# Altium PCB PCB1.PcbDoc
Units mm, origin at the board's own origin, x right, y up, seen from the top; angles counter-clockwise.
Board outline 152.4 x 101.6 mm, 2 copper layers (Top Layer, Bottom Layer); 15 components, 9 nets, 40 pads, 0 vias.
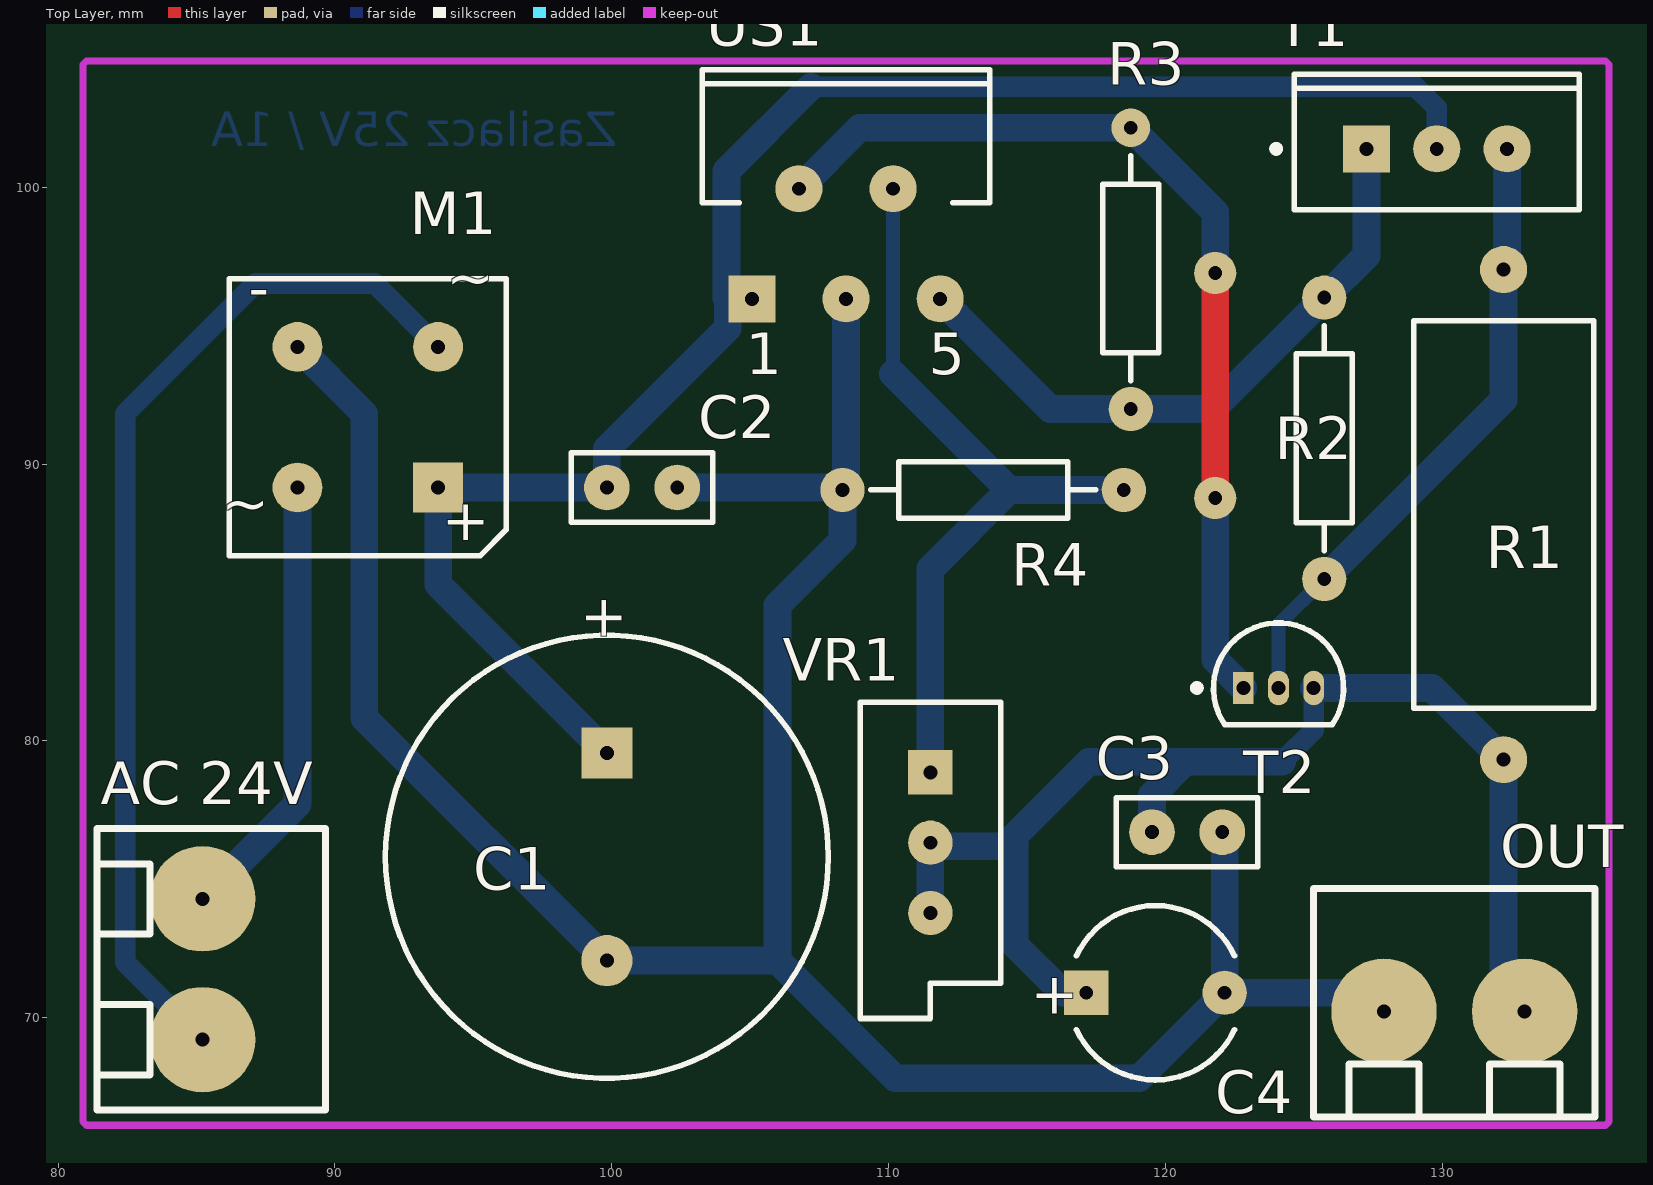
[diagram p0: Top Layer view]
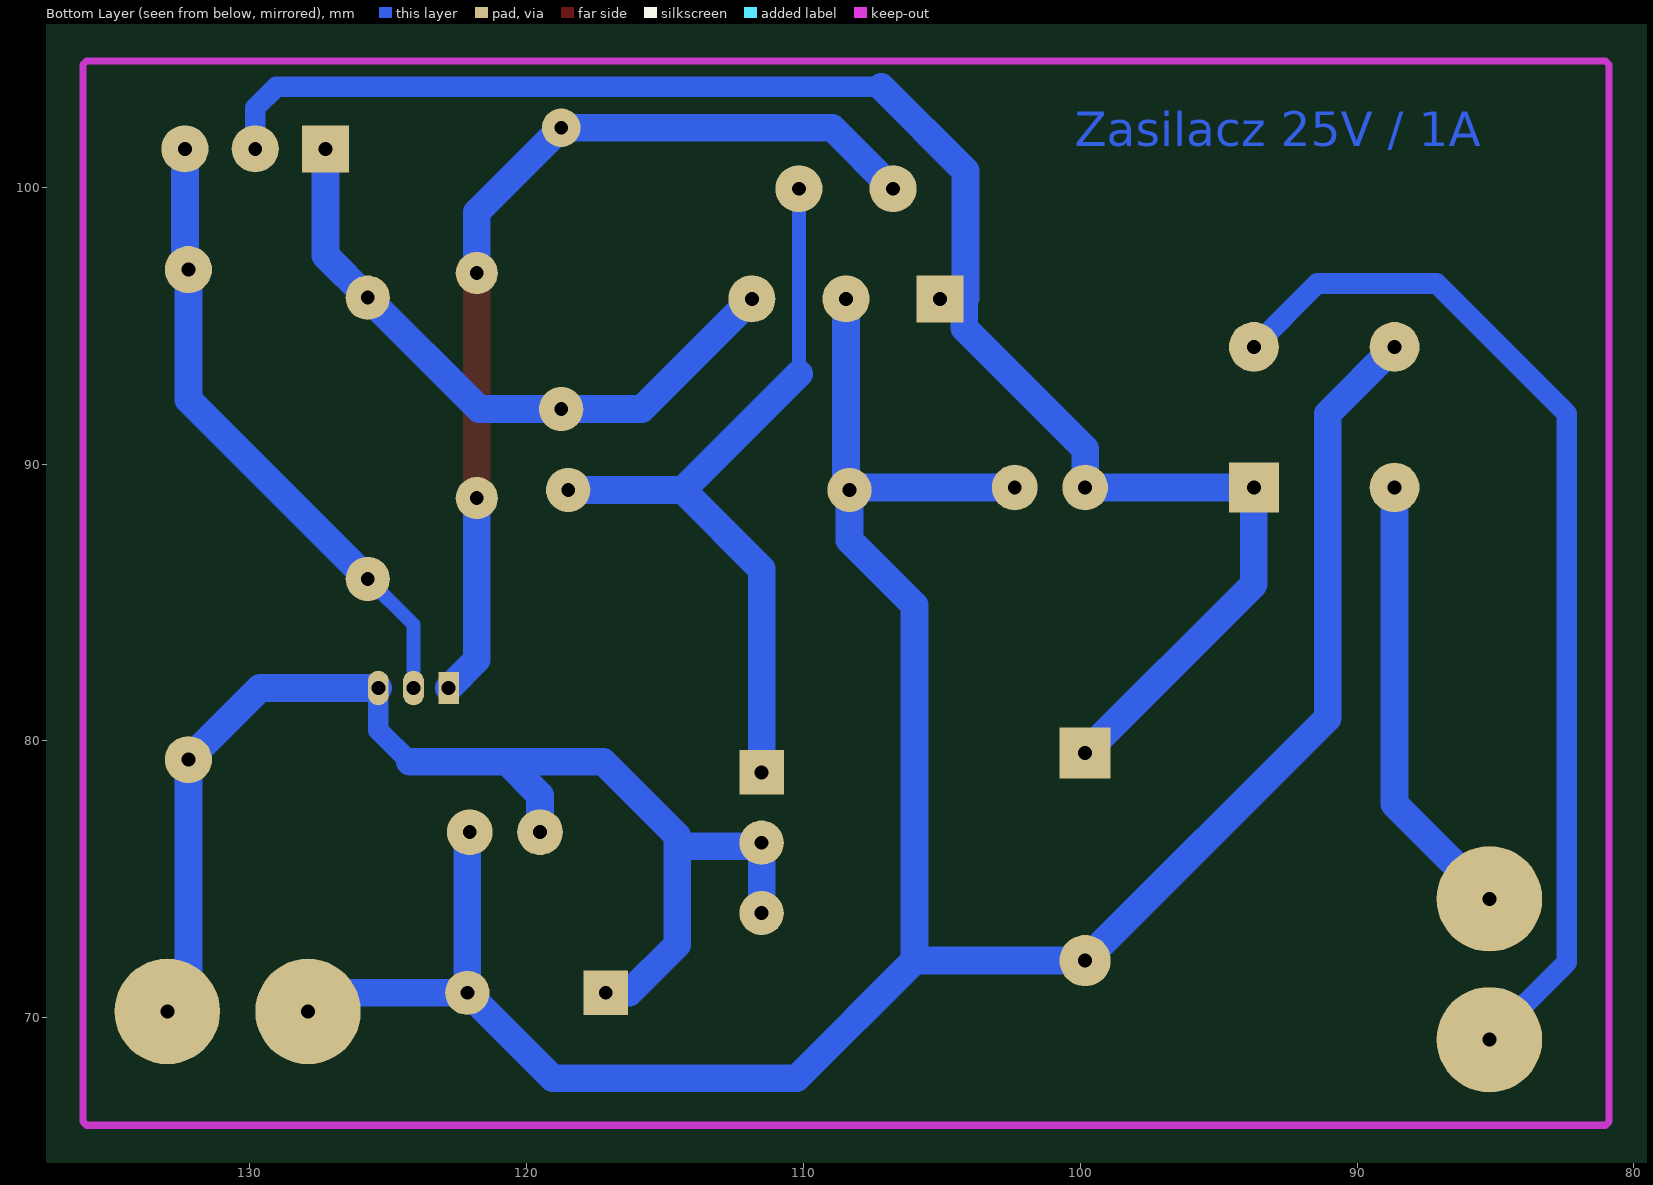
[diagram p1: Bottom Layer view, seen from below]

## Layer stack, top to bottom
Top Solder: solder mask 0.0102, Solder Resist, Dk 3.5
Top Layer: signal copper 0.0356
Dielectric 1: dielectric 0.32, FR-4, Dk 4.8
Bottom Layer: signal copper 0.0356
Bottom Solder: solder mask 0.0102, Solder Resist, Dk 3.5

## Board outline
25.4,25.4 177.8,25.4 177.8,127 25.4,127

## Design rules (kind name [scope] priority, off if disabled: settings)
Clearance [All] p1: gap=0.254
PolygonConnect [All] p1: connectstyle=Relief reliefconductorwidth=0.254 reliefentries=4 polygonreliefangle="90 Angle" airgapwidth=0.254
RoomDefinition Sheet1 [InComponentClass('Sheet1')] p1: confinementstyle=ConfineIn formatcopy=TRUE lockcomponents=FALSE outline 81.026,66.122 135.89,66.122 135.89,104.561 81.026,104.561
RoutingVias [All] p1: holewidth=0.711 width=1.27 viastyle="Through Hole" minholewidth=0.711 minwidth=1.27 maxholewidth=0.711 maxwidth=1.27
SolderMaskExpansion [All] p1: expansion=0.102
Width [All] p1: maxlimit=4.064 minlimit=0.508 preferedwidth=1.016
29 further rules are at their usual default settings.

## Components (designator, comment, footprint, x,y, rotation, side; value= is the part's Value field where it differs from the comment)
"AC 24V" "k" ARK2 85.217,74.295 r270 top
C1 "Cap Pol1" CAPPR7.5-16x20 99.822,75.819 r270 top
C2 "Cap Semi" CAPR2.54-5.1x2.5 101.092,89.154 r180 top
C3 "Cap Semi" CAPR2.54-5.1x2.5 120.777,76.708 r180 top
C4 "Cap Pol1" CAPPR5-6.3x15 119.634,70.906 r0 top
M1 "Bridge1" D-38 91.186,91.694 r180 top
OUT "ARK" ARK2 127.889,70.231 r0 top
R1 "Res2" RES17.7-14X6.5 132.207,88.178 r90 top
R2 "Res2" AXIAL-0.4#1 125.73,90.932 r270 top
R3 "Res2" AXIAL-0.4#2 118.745,97.068 r90 top
R4 "Res2" AXIAL-0.4#1 113.411,89.067 r0 top
T1 "BUV27" ONSC-TO-220-3-221A-09 129.794,101.386 r90 top
T2 "BC547B" ONSC-TO-92-3-29-11 124.079,81.915 r0 top
US1 "L200C" PentawattV 108.458,97.957 r0 top
VR1 "RPot" VR5 111.506,76.327 r270 top

## Footprints (in the part's own frame and the unit in brackets; to place one, negate y for a bottom-side part, rotate by r counter-clockwise, add the part's x,y. Pads: shape width x height; smd on the part's side, far side on the other; paste and mask are expansions set on the pad)
ARK2 [mm]
  round 3.81 hole 0.5: 1(0,0) 2(5.08,0)
  silkscreen extent -2.54,-3.81 7.62,4.45
AXIAL-0.4#1 [mm] "Axial Device, Thru-Hole; 2 Leads; 0.4 in Pin Spacing"
  round 1.6 hole 0.5: 1(-5.08,0) 2(5.08,0)
  silkscreen extent -4.06,-1.02 4.06,1.02
AXIAL-0.4#2 [mm] "Axial Device, Thru-Hole; 2 Leads; 0.4 in Pin Spacing"
  round 1.6 hole 0.5: 1(-5.08,0)
  round 1.4 hole 0.5: 2(5.08,0)
  silkscreen extent -4.06,-1.02 4.06,1.02
CAPPR5-6.3x15 [mm] "Capacitor, Electrolytic, Radial; Body 6.3 x 15 mm (Dia.xH typ); Pin Spacing 5 mm (typ)"
  rect 1.6x1.6 hole 0.5: 1(-2.5,0)
  round 1.6 hole 0.5: 2(2.5,0)
  silkscreen extent -2.85,-3.15 2.85,3.15
CAPPR7.5-16x20 [mm] "Capacitor, Electrolytic, Radial; Body 16 x 20 mm (Dia.xH typ); Pin Spacing 7.5 mm (typ)"
  rect 1.85x1.85 hole 0.5: 1(-3.75,0)
  round 1.85 hole 0.5: 2(3.75,0)
  silkscreen extent -8,-8 8,8
CAPR2.54-5.1x2.5 [mm] "Capacitor, Ceramic, Thru-Hole, Dipped Radial; Body 5.1 x 2.5 mm (WxT) Pin Spacing 2.54 mm (typ)"
  round 1.65 hole 0.5: 1(-1.27,0) 2(1.27,0)
  silkscreen extent -2.55,-1.25 2.55,1.25
D-38 [mm] "Bridge Rectifier; 4 Terminals; Body 9.4 x 9.4 mm (typ); Pitch 5.08 mm"
  rect 1.8x1.8 hole 0.5: 1(-2.54,2.54)
  round 1.8 hole 0.5: 2(-2.54,-2.54) 3(2.54,-2.54) 4(2.54,2.54)
  silkscreen extent -5,-5 5,5, body extent -5,-5 5,5, height 9.91
ONSC-TO-92-3-29-11 [mm] "TO, 3-Leads, Body Dia 4.7mm, Pitch 1.27mm"
  rect 0.75x1.15 hole 0.5: 1(-1.27,0)
  oval 0.75x1.25 hole 0.5: 2(0,0) 3(1.27,0)
  silkscreen extent -3.07,-1.34 2.35,2.35, body extent -2.36,-1.34 2.36,2.36, height 7.87
ONSC-TO-220-3-221A-09 [mm] "FM, 3-Leads, Body 10.3x4.85mm, Pitch 2.54mm"
  rect 1.7x1.7 hole 0.5: 1(0,2.54)
  round 1.7 hole 0.5: 2(0,0) 3(0,-2.54)
  silkscreen extent -2.2,-5.15 2.7,5.92, body extent -2.18,-5.15 2.67,5.15, height 19.85
PentawattV [mm] "TO, Thru-Hole, Vertical, Heatsink Mounted; 5 Bent Staggered Leads; Pitch 1.7 mm"
  rect 1.7x1.7 hole 0.5: 1(-3.4,-1.99)
  round 1.7 hole 0.5: 2(-1.7,1.99) 3(0,-1.99) 4(1.7,1.99) 5(3.4,-1.99)
  silkscreen extent -5.2,1.48 5.2,6.28
RES17.7-14X6.5 [mm] "Resistor, Axial; Body 14 x 6.5 x 6.5mm (LxWxH max), Lead Dia. 0.7 mm (max)"
  round 1.7 hole 0.5: 1(-8.85,0) 2(8.85,0)
  silkscreen extent -7,-3.25 7,3.25
VR5 [mm] "Thru-Hole; 3 Leads"
  rect 1.6x1.6 hole 0.5: 1(-2.54,0)
  round 1.6 hole 0.5: 2(0,0) 3(2.54,0)
  silkscreen extent -5.08,-2.54 6.35,2.54

## Part data
"AC 24V": library part ARK
C1 C4: "Polarized Capacitor (Radial)"
C2 C3: "Capacitor (Semiconductor SIM Model)"
M1: "Full Wave Diode Bridge"
R1 R2 R3 R4: "Resistor"
T1: "NPN Silicon Power Transistor, 3-Pin TO-220, Tube"
T2: "Amplifier Transistor, NPN Silicon, 3-Pin TO-92, Bulk Box"
US1: library part L200CV, "Adjustable Voltage and Current Regulator, 5-Pin Pentawatt, Tube"
VR1: "Potentiometer"

## Free pads (board coordinates)
  round 1.524 hole 0.5: 0(121.793,96.901) 1(121.793,88.773)

## Nets (pads, with @x,y where several pads share a name; then routed paths per layer and width w, separated by ;. In a path a pad name is that pad's centre, name@x,y a point inside that pad or via, vN(x,y) a via of type N, cw(c..) or ccw(c..) an arc to the next point about the centre after c; other vN are vias at no path point)
GND: C1.2 C2.1 C3.1 C4.2 M1.3 OUT.1 R4.1 US1.3 | length 94.9
  Bottom Layer w1: M1.3 91.059,91.821 91.059,80.832 C1.2 105.985,72.069 ; C2.1 108.244,89.154 R4.1 ; US1.3 108.458,89.194 R4.1 ; C3.1 122.134,76.621 C4.2 ; OUT.1 127.214,70.906 C4.2 ; 105.985,72.069 105.985,84.903 108.331,87.249 R4.1 ; 105.985,72.069 110.236,67.818 119.046,67.818 C4.2
"NetAC 24V_1": "AC 24V.1" M1.4 | length 16.3
  Bottom Layer w1: 85.217,74.295 88.646,77.724 M1.4
"NetAC 24V_2": "AC 24V.2" M1.2 | length 38
  Bottom Layer w0.75: 85.217,69.215 82.423,72.009 82.423,91.821 87.122,96.52 91.44,96.52 M1.2
NetC1_1: C1.1 C2.2 M1.1 T1.2 US1.1 | length 60.2
  Bottom Layer w0.75: 107.188,103.632 129.032,103.632 129.794,102.87 T1.2
  Bottom Layer w1: C1.1 93.726,85.665 M1.1 C2.2 99.822,90.551 104.185,94.914 104.185,95.967 104.14,96.012 104.14,100.584 107.188,103.632
NetC3_2: C3.2 C4.1 OUT.2 R1.1 T2.3 VR1.2 VR1.3 | length 47.1
  Bottom Layer w0.75: 124.206,79.248 125.349,80.391 T2.3
  Bottom Layer w1: VR1.3@111.506,73.66 111.506,76.2 114.554,76.2 ; C4.1 116.292,70.906 114.554,72.644 114.554,76.2 ; C3.2 119.507,78.041 120.713,79.248 ; 124.206,79.248 120.713,79.248 ; T2.3@125.358,81.915 129.62,81.915 R1.1 132.207,70.993 OUT.2 ; 114.554,76.2 114.554,76.581 117.221,79.248 120.713,79.248
NetR1_2: R1.2 R2.2 T1.3 T2.2 | length 22.9
  Bottom Layer w0.508: T2.2 124.079,84.201 R2.2
  Bottom Layer w1: R2.2 132.207,92.329 R1.2 132.334,97.155 T1.3
NetR2_1: R2.1 R3.1 T1.1 US1.5 | length 23.2
  Bottom Layer w1: US1.5 115.837,91.988 R3.1 121.706,91.988 R2.1 127.254,97.536 T1.1
NetR3_2: pad.0 pad.1 R3.2 T2.1 US1.2 | length 34.9
  Top Layer w1: pad.1@121.793,88.9 pad.0
  Bottom Layer w1: US1.2 108.959,102.148 R3.2 121.793,99.1 pad.0 ; pad.1@121.793,89.027 pad.1 121.793,82.931 T2.1
NetR4_2: R4.2 US1.4 VR1.1 | length 28.3
  Bottom Layer w0.508: 110.158,93.267 US1.4
  Bottom Layer w1: 110.158,93.267 114.358,89.067 ; VR1.1@111.506,78.74 111.506,86.215 114.358,89.067 ; R4.2 114.358,89.067

## Keep-outs
Keep-Out Layer:
  lines w0.254: 80.899,66.249 81.026,66.122 135.89,66.122 136.017,66.249 136.017,104.434 135.89,104.561 81.026,104.561 80.899,104.434 80.899,66.249

## Other copper
Bottom Layer:
  text "Zasilacz 25V / 1A" at 100.203,101.473 h1.24

## Dimensions
80.899,104.434 to 136.017,104.434 on Keep-Out Layer
135.89,104.561 to 135.89,66.122 on Keep-Out Layer

## Text inside footprints (layer, text, board x,y; h text height)
C1: Top Overlay "+" at 99.072,85.294 h1.5 r270
C4: Top Overlay "+" at 115.134,70.156 h1.5
M1: Top Overlay "+" at 95.596,88.53 h1.5 r180; Top Overlay "-" at 87.63,96.774 h1.5 r180; Top Overlay "~" at 95.758,97.282 h1.5 r180; Top Overlay "~" at 87.63,89.154 h1.5 r180
US1: Top Overlay "5" at 111.438,93.242 h1.5; Top Overlay "1" at 104.838,93.242 h1.5